# EAGLE board HFT-ArduinoShield-Module_1V0 (EAGLE 7.7.0)
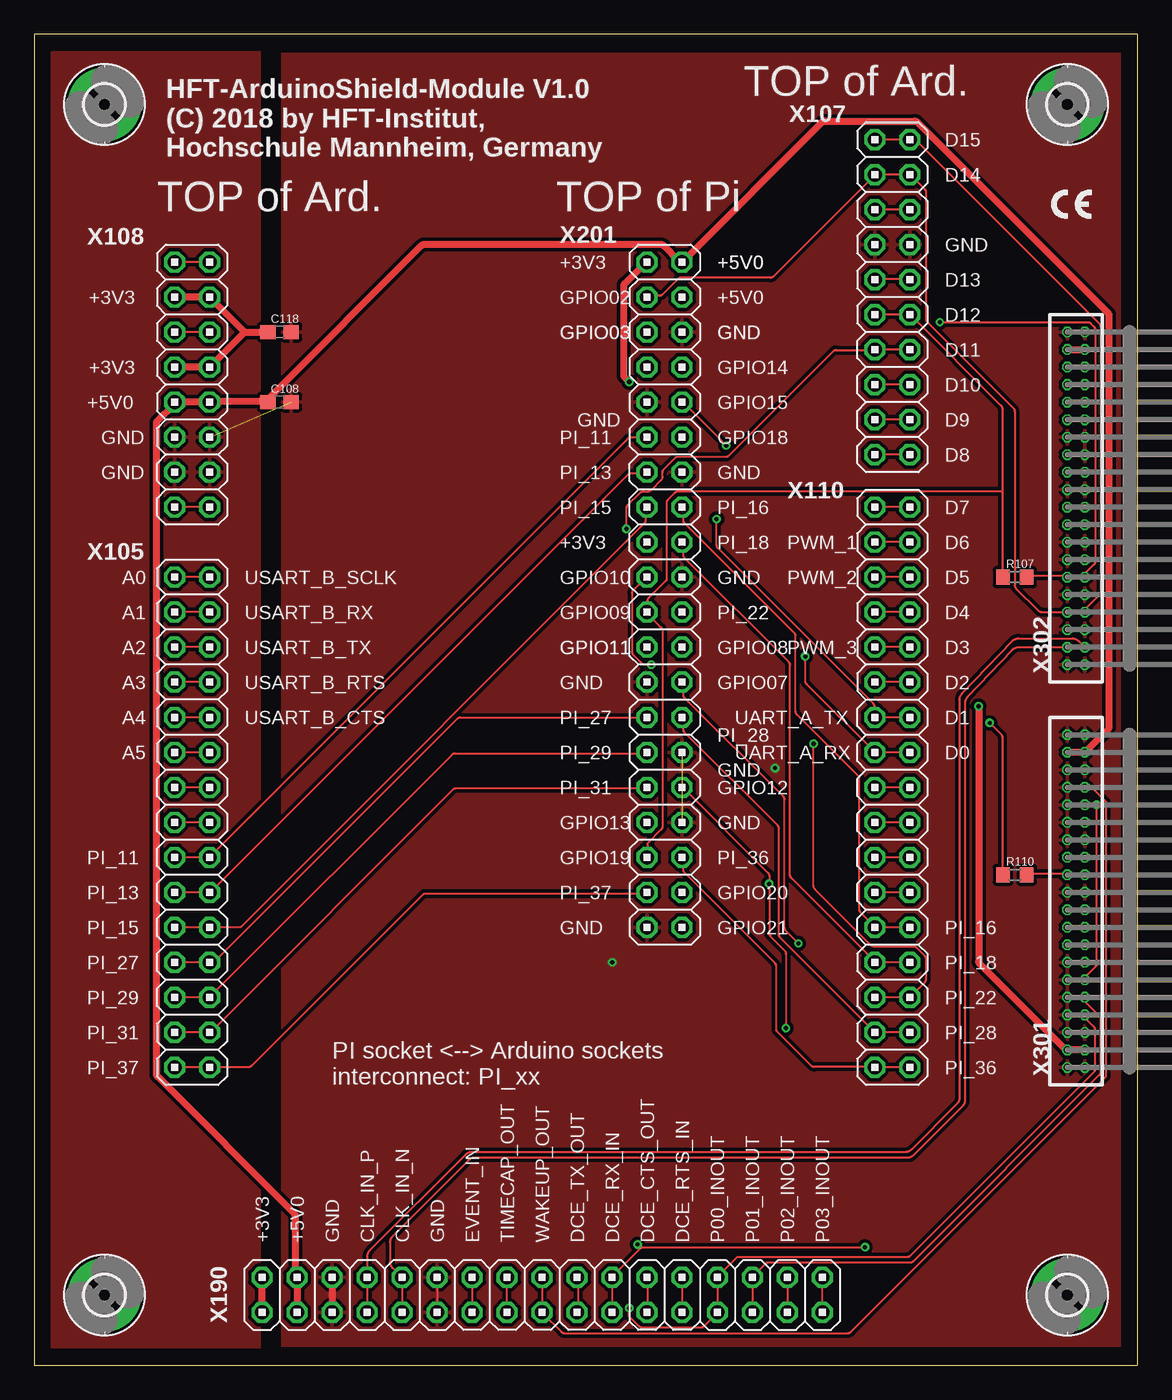
[diagram p0: board, top side]
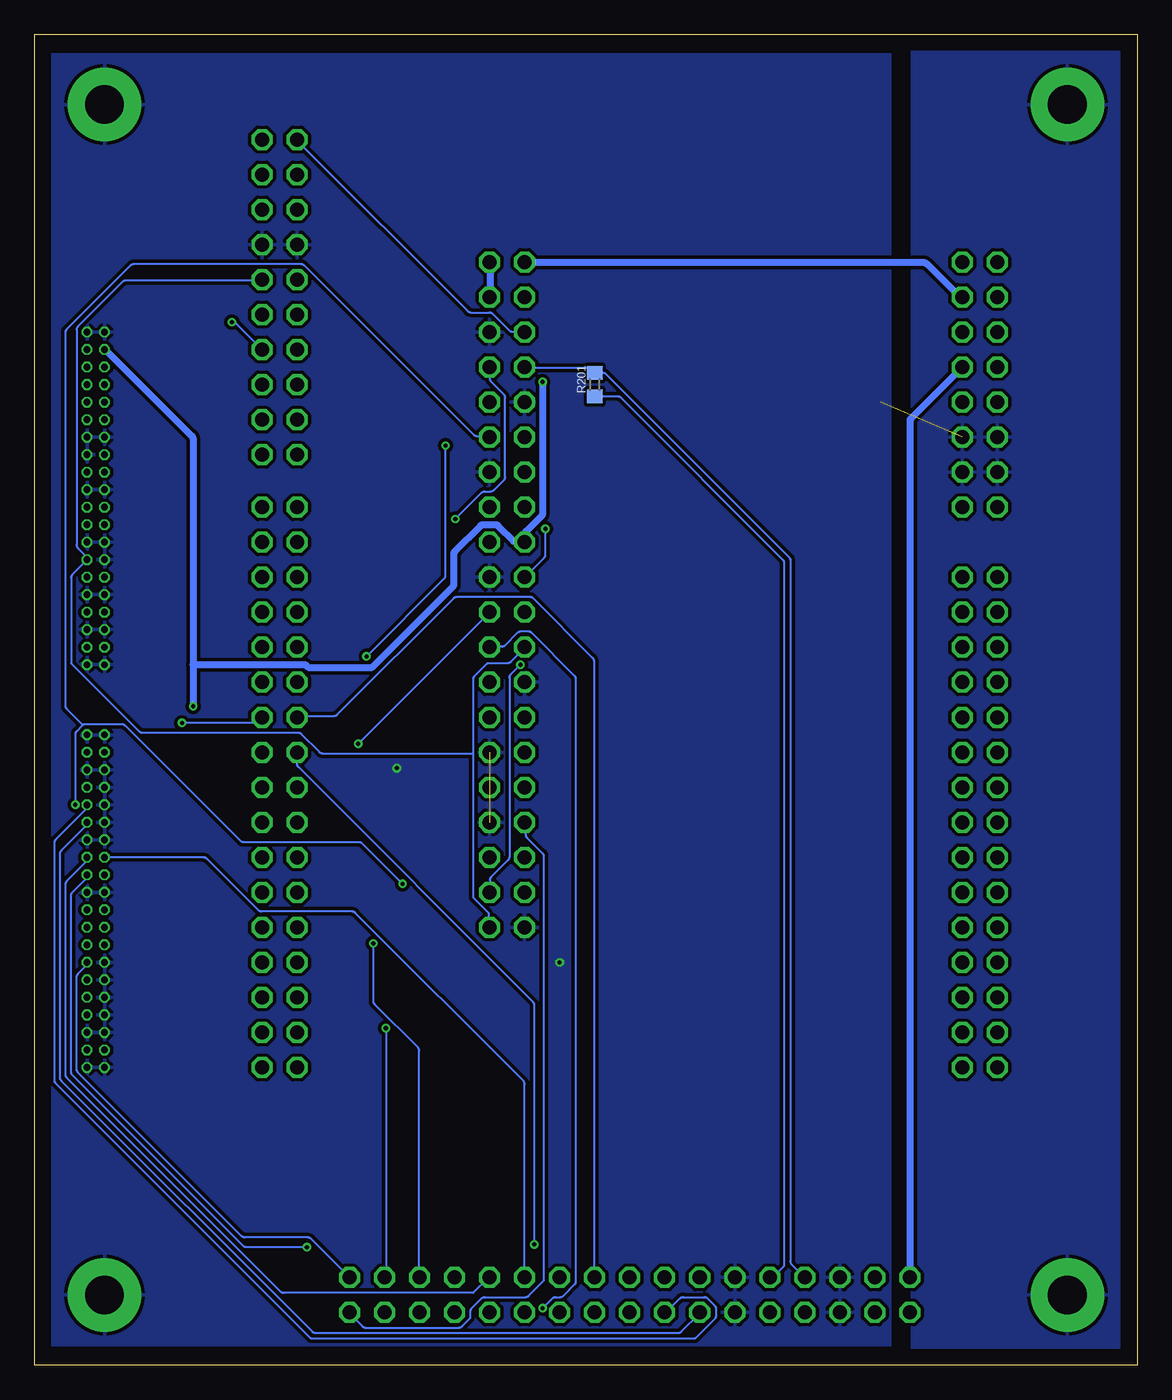
[diagram p1: board, bottom side, seen from below]

Size 80.01 x 96.52 mm. Coordinates in mm from the lower left corner, seen from the top.
Outline: 0,0 80.01,0 80.01,96.52 0,96.52 0,0
Copper layers ((1*2)+(15*16)): Top 0.035mm / dielectric 0.65mm / Route2 0.035mm / dielectric 0.65mm / Route15 0.035mm / dielectric 0.65mm / Bottom 0.035mm
Design rules "DirtyPCBs_4layers_6mil_20150401 *": minimum track width 6mil, minimum drill 12mil, track to track 0.25mm, track to pad 0.25mm, pad to pad 6mil, via to via 6mil, smd to smd 0mil, copper to edge 10mil, drill to drill 10mil, minimum pad ring 5mil, minimum via ring 6mil, stop-mask expansion 2mil, vias tented up to drill 25mil, thermal gap 10mil
Net classes: 1 power: width 0.5 mm; 2 bus: clearance 0.6 mm
tRestrict: area 95.2,0 to 96.5,96.5; area 16.5,0 to 96.5,1.3; area 16.5,0 to 17.8,96.5; area 16.5,95.2 to 96.5,96.5
bRestrict: area 16.5,95.2 to 96.5,96.5; area 95.2,0 to 96.5,96.5; area 16.5,0 to 96.5,1.3; area 16.5,0 to 17.8,96.5

## Footprints (pad centres in the part's own frame; a part is rotated, then mirrored left to right if it is on the bottom)
C0603 = smd 1.1 x 1: 1 -0.85,0; 2 0.85,0
2,8-PAD = drill 2.8 pad 5.334: B2,8 0,0
R0603 = smd 1 x 1.1: 1 -0.85,0; 2 0.85,0
2X15 = drill 1.016 octagon: 1 -19.05,-1.27; 2 -19.05,1.27; 3 -16.51,-1.27; 4 -16.51,1.27; 5 -13.97,-1.27; 6 -13.97,1.27; 7 -11.43,-1.27; 8 -11.43,1.27; 9 -8.89,-1.27; 10 -8.89,1.27; 11 -6.35,-1.27; 12 -6.35,1.27; 13 -3.81,-1.27; 14 -3.81,1.27; 15 -1.27,-1.27; 16 -1.27,1.27; 17 1.27,-1.27; 18 1.27,1.27; 19 3.81,-1.27; 20 3.81,1.27; 21 6.35,-1.27; 22 6.35,1.27; 23 8.89,-1.27; 24 8.89,1.27; 25 11.43,-1.27; 26 11.43,1.27; 27 13.97,-1.27; 28 13.97,1.27; 29 16.51,-1.27; 30 16.51,1.27
2X10 = drill 1.016 octagon: 1 -11.43,-1.27; 2 -11.43,1.27; 3 -8.89,-1.27; 4 -8.89,1.27; 5 -6.35,-1.27; 6 -6.35,1.27; 7 -3.81,-1.27; 8 -3.81,1.27; 9 -1.27,-1.27; 10 -1.27,1.27; 11 1.27,-1.27; 12 1.27,1.27; 13 3.81,-1.27; 14 3.81,1.27; 15 6.35,-1.27; 16 6.35,1.27; 17 8.89,-1.27; 18 8.89,1.27; 19 11.43,-1.27; 20 11.43,1.27
2X08 = drill 1.016 octagon: 1 -8.89,-1.27; 2 -8.89,1.27; 3 -6.35,-1.27; 4 -6.35,1.27; 5 -3.81,-1.27; 6 -3.81,1.27; 7 -1.27,-1.27; 8 -1.27,1.27; 9 1.27,-1.27; 10 1.27,1.27; 11 3.81,-1.27; 12 3.81,1.27; 13 6.35,-1.27; 14 6.35,1.27; 15 8.89,-1.27; 16 8.89,1.27
2X17 = drill 1.016 octagon: 1 -21.59,-1.27; 2 -21.59,1.27; 3 -19.05,-1.27; 4 -19.05,1.27; 5 -16.51,-1.27; 6 -16.51,1.27; 7 -13.97,-1.27; 8 -13.97,1.27; 9 -11.43,-1.27; 10 -11.43,1.27; 11 -8.89,-1.27; 12 -8.89,1.27; 13 -6.35,-1.27; 14 -6.35,1.27; 15 -3.81,-1.27; 16 -3.81,1.27; 17 -1.27,-1.27; 18 -1.27,1.27; 19 1.27,-1.27; 20 1.27,1.27; 21 3.81,-1.27; 22 3.81,1.27; 23 6.35,-1.27; 24 6.35,1.27; 25 8.89,-1.27; 26 8.89,1.27; 27 11.43,-1.27; 28 11.43,1.27; 29 13.97,-1.27; 30 13.97,1.27; 31 16.51,-1.27; 32 16.51,1.27; 33 19.05,-1.27; 34 19.05,1.27
2X20 = drill 1.016 octagon: 1 -22.86,-1.27; 2 -22.86,1.27; 3 -20.32,-1.27; 4 -20.32,1.27; 5 -17.78,-1.27; 6 -17.78,1.27; 7 -15.24,-1.27; 8 -15.24,1.27; 9 -12.7,-1.27; 10 -12.7,1.27; 11 -10.16,-1.27; 12 -10.16,1.27; 13 -7.62,-1.27; 14 -7.62,1.27; 15 -5.08,-1.27; 16 -5.08,1.27; 17 -2.54,-1.27; 18 -2.54,1.27; 19 0,-1.27; 20 0,1.27; 21 2.54,-1.27; 22 2.54,1.27; 23 5.08,-1.27; 24 5.08,1.27; 25 7.62,-1.27; 26 7.62,1.27; 27 10.16,-1.27; 28 10.16,1.27; 29 12.7,-1.27; 30 12.7,1.27; 31 15.24,-1.27; 32 15.24,1.27; 33 17.78,-1.27; 34 17.78,1.27; 35 20.32,-1.27; 36 20.32,1.27; 37 22.86,-1.27; 38 22.86,1.27; 39 25.4,-1.27; 40 25.4,1.27
2X20/90_1MM27_HARWIN_M50-3902042_HEADER = drill 0.5 pad 0.762 octagon: 1 -11.43,0; 2 -11.43,1.27; 3 -10.16,0; 4 -10.16,1.27; 5 -8.89,0; 6 -8.89,1.27; 7 -7.62,0; 8 -7.62,1.27; 9 -6.35,0; 10 -6.35,1.27; 11 -5.08,0; 12 -5.08,1.27; 13 -3.81,0; 14 -3.81,1.27; 15 -2.54,0; 16 -2.54,1.27; 17 -1.27,0; 18 -1.27,1.27; 19 0,0; 20 0,1.27; 21 1.27,0; 22 1.27,1.27; 23 2.54,0; 24 2.54,1.27; 25 3.81,0; 26 3.81,1.27; 27 5.08,0; 28 5.08,1.27; 29 6.35,0; 30 6.35,1.27; 31 7.62,0; 32 7.62,1.27; 33 8.89,0; 34 8.89,1.27; 35 10.16,0; 36 10.16,1.27; 37 11.43,0; 38 11.43,1.27; 39 12.7,0; 40 12.7,1.27

## Placement (x,y rotation side)
C108  100nF  [C0603]  17.78,69.85 0 top
C118  100nF  [C0603]  17.78,74.93 0 top
H401  MOUNT-PAD-ROUND2.8  [2,8-PAD]  74.93,91.44 0 top
H402  MOUNT-PAD-ROUND2.8  [2,8-PAD]  5.08,91.44 0 top
H403  MOUNT-PAD-ROUND2.8  [2,8-PAD]  5.08,5.08 0 top
H404  MOUNT-PAD-ROUND2.8  [2,8-PAD]  74.93,5.08 0 top
R107  47R  [R0603]  71.12,57.15 0 top
R110  47R  [R0603]  71.12,35.56 0 top
R201  120R  [R0603]  39.37,71.12 90 bottom
X105  [2X15]  11.43,38.1 270 top
X107  [2X10]  62.23,77.47 270 top
X108  [2X08]  11.43,71.12 270 top
X110  [2X17]  62.23,40.64 270 top
X190  [2X17]  38.1,5.08 0 top
X201  [2X20]  45.72,57.15 270 top
X301  2X20/90_1MM27_HARWIN_M50-3902042_HEADER  [2X20/90_1MM27_HARWIN_M50-3902042_HEADER]  76.2,33.02 90 top
X302  2X20/90_1MM27_HARWIN_M50-3902042_HEADER  [2X20/90_1MM27_HARWIN_M50-3902042_HEADER]  76.2,62.23 90 top

## Library data of the parts
C108 C118 R107 R110 R201 = df4iah_rcl
H401-H404 = holes
X105 X107 X108 X110 X190 X201 X301 X302 = df4iah_connector

## Nets
+3V3 [power]: C118.1 X108.3 X108.4 X108.7 X108.8 X190.1 X190.2 X201.1 X201.17 X301.3 X301.4 X302.37 X302.38
+5V0 [power]: C108.1 X108.9 X108.10 X190.3 X190.4 X201.2 X201.4 X301.37 X301.38
CLK_IN_N [bus]: R201.1 X190.9 X190.10 X302.4
CLK_IN_P [bus]: R201.2 X190.7 X190.8 X201.7 X302.3
DCE_CTS_OUT: X190.23 X190.24 X301.26
DCE_RTS_IN: X190.25 X190.26 X301.25
DCE_RX_IN: X110.15 X110.16 X190.21 X190.22 X201.10 X301.23
DCE_TX_OUT: R110.2 X301.24
DCE_TX_OUT_R: R110.1 X110.13 X110.14 X190.19 X190.20 X201.8
EVENT_IN: X190.13 X190.14 X301.29
GND: C108.2 C118.2 H401.B2,8 H402.B2,8 H403.B2,8 H404.B2,8 X107.7 X107.8 X108.11 X108.12 X108.13 X108.14 X190.5 X190.6 X190.11 X190.12 X201.6 X201.9 X201.14 X201.20 X201.25 X201.30 X201.34 X201.39 X301.1 X301.2 X301.5 X301.6 X301.8 X301.10 X301.12 X301.14 X301.21 X301.22 X301.27 X301.28 X301.30 X301.32 X301.34 X301.35 X301.36 X301.39 X301.40 X302.1 X302.2 X302.5 X302.6 X302.9 X302.10 X302.14 X302.15 X302.16 X302.21 X302.22 X302.25 X302.27 X302.28 X302.39 X302.40
I2C_SCL_IN: X107.1 X107.2 X201.5 X302.7
I2C_SDA_INOUT: X107.3 X107.4 X201.3 X302.8
I2S_A_FS_IN: X302.20
I2S_A_MCLK_IN: X302.19
I2S_A_SCK_IN: X302.17
I2S_A_SD_IN: X302.18
I2S_B_FS_OUT: X302.26
I2S_B_SCK_OUT: X302.23
I2S_B_SD_OUT: X302.24
N105_01: X105.1 X105.2
N105_03: X105.3 X105.4
N105_05: X105.5 X105.6
N105_07: X105.7 X105.8
N105_09: X105.9 X105.10
N105_11: X105.11 X105.12
N105_13: X105.13 X105.14
N105_15: X105.15 X105.16
N107_05: X107.5 X107.6
N107_15: X107.15 X107.16
N107_17: X107.17 X107.18
N107_19: X107.19 X107.20
N108_01: X108.1 X108.2
N108_05: X108.5 X108.6
N108_15: X108.15 X108.16
N110_01: X110.1 X110.2
N110_03: X110.3 X110.4
N110_05: X110.5 X110.6
N110_07: X110.7 X110.8
N110_09: X110.9 X110.10
N110_11: X110.11 X110.12
N110_17: X110.17 X110.18
N110_19: X110.19 X110.20
N110_21: X110.21 X110.22
N110_23: X110.23 X110.24
P00: X190.27 X190.28 X201.24 X301.7
P01: X190.29 X190.30 X201.26 X301.9
P02: X190.31 X190.32 X201.12 X201.32 X301.11
P03: X190.33 X190.34 X201.33 X301.13
PI_11: X105.17 X105.18 X201.11
PI_13: X105.19 X105.20 X201.13
PI_15: X105.21 X105.22 X201.15
PI_16: X110.25 X110.26 X201.16
PI_18: X110.27 X110.28 X201.18
PI_22: X110.29 X110.30 X201.22
PI_27: X105.23 X105.24 X201.27
PI_28: X110.31 X110.32 X201.28
PI_29: X105.25 X105.26 X201.29
PI_31: X105.27 X105.28 X201.31
PI_36: X110.33 X110.34 X201.36
PI_37: X105.29 X105.30 X201.37
SPI_MISO_OUT: R107.2 X302.12
SPI_MISO_OUT_R: R107.1 X107.11 X107.12 X201.21 X201.35
SPI_MOSI_IN: X107.13 X107.14 X201.19 X201.38 X302.11
SPI_SCK_IN: X107.9 X107.10 X201.23 X201.40 X302.13
TIMCAP_OUT: X190.15 X190.16 X301.31
WAKEUP_OUT: X190.17 X190.18 X301.33

## Tracks (layer width: path | path; a pad name or v marks a point on that pad's centre or on a via)
+3V3  (via drill 0.3)
  Top 0.5: X301.3 X301.4 74.73,22.94 68.59,29.08 arc-45 68.5,29.31 v68.5,47.78 | X108.7 X108.8 15.24,74.93 | 15.24,74.93 C118.1 | 15.24,74.93 X108.4 X108.3 | X302.38 74.94,73.64 76.14,73.64 X302.37 | X190.1 16.49,3.82 16.49,6.14 X190.2 | v43.15,71.33 42.84,71.64 arc-45 42.74,71.86 42.74,78.24 arc-45 42.84,78.46 44.35,79.98 X201.1
  Bottom 0.5: 12.77,77.46 X108.4 12.97,77.56 15.29,79.88 arc-45 15.51,79.98 44.35,79.98 X201.1 | 68.5,50.8 68.5,67.17 arc-45 68.59,67.39 74.83,73.64 X302.38 | 68.5,50.8 v68.5,47.78 | 68.5,50.8 60.35,50.8 60.15,50.6 55.52,50.6 49.68,56.44 arc-45 49.58,56.67 49.58,58.82 arc45 49.49,59.05 47.66,60.87 arc45 47.44,60.96 46.6,60.96 arc45 46.37,60.87 45.26,59.76 44.45,59.76 X201.17 44.35,59.96 44.35,60.46 43.24,61.58 arc-45 43.15,61.8 v43.15,71.33 | X190.2 16.49,6.44 16.49,68.48 arc45 16.39,68.7 12.77,72.33 X108.8
+5V0
  Top 0.5: X301.38 X301.37 76.34,44.57 77.86,46.08 arc45 77.95,46.31 77.95,76.12 arc45 77.86,76.35 64.06,90.14 arc45 63.84,90.24 57.36,90.24 arc45 57.14,90.14 47.07,80.08 X201.2 46.77,80.08 45.65,81.19 arc45 45.43,81.28 28.29,81.28 arc45 28.06,81.19 16.99,70.12 C108.1 16.89,69.92 12.87,69.92 X108.10 X108.9 10.05,69.61 8.93,68.5 arc45 8.84,68.28 8.84,21.16 arc45 8.93,20.93 18.81,11.06 arc-45 18.9,10.83 18.9,6.54 X190.4 X190.3
  Bottom 0.5: X201.4 46.97,77.56 46.97,79.98 X201.2
CLK_IN_N
  Top 0.152: X302.4 71.39,52.07 arc47 70.93,51.87 67.69,48.44 arc43 67.51,48.01 67.51,19.23 arc-45 67.33,18.78 63.77,15.22 arc-45 63.32,15.04 31.94,15.04 arc45 31.49,14.85 25.97,9.33 arc45 25.78,8.88 25.78,7.5 arc45 25.97,7.05 X190.10 X190.9
  Bottom 0.152: R201.1 37.67,70.27 arc45 37.5,70.2 25.7,58.4 arc45 25.63,58.22 25.63,7.3 arc45 25.72,7.08 26.4,6.39 | 26.4,6.39 26.44,6.35 | 26.4,6.39 26.45,6.44 26.65,6.44 X190.10
CLK_IN_P
  Top 0.152: X302.3 75.75,52.52 arc45 75.3,52.7 71.39,52.7 arc46 70.93,52.51 67.28,48.7 arc44 67.11,48.26 67.11,19.4 arc-45 66.92,18.95 63.6,15.63 arc-45 63.15,15.44 31.71,15.44 arc45 31.26,15.26 24.32,8.31 arc45 24.13,7.87 X190.8 24.13,6.34 24.13,3.82 X190.7
  Bottom 0.152: X190.8 25.08,7.3 arc45 25.17,7.53 25.17,58.41 arc-45 25.25,58.59 38.54,71.88 arc-45 38.76,71.97 R201.2 39.42,72.03 39.73,72.33 44.35,72.33 X201.7
DCE_CTS_OUT
  Top 0.152: X190.23 44.45,3.82 44.45,6.34 X190.24
  Bottom 0.152: X301.26 74.83,36.82 67.72,36.82 arc45 67.5,36.73 63.76,32.99 arc-45 63.54,32.9 56.96,32.9 arc45 56.73,32.8 44.55,20.61 arc45 44.45,20.39 44.45,6.44 X190.24
DCE_RTS_IN
  Top 0.152: X190.26 X190.25
  Bottom 0.152: X301.25 76.24,36.82 76.24,36.52 77.66,35.1 arc-45 77.75,34.88 77.75,21.06 arc-45 77.66,20.83 62.15,5.32 arc-45 61.93,5.23 48.18,5.23 47.07,6.34 X190.26
DCE_RX_IN  (via drill 0.3)
  Top 0.152: X190.21 X190.22 41.94,6.44 44,8.5 | X110.16 X110.15 60.95,44.47 56.02,49.4 arc-45 55.92,49.63 v55.92,51.41 | v50.19,66.7 47.07,69.82 X201.10 | v60.25,8.55 44.05,8.55 44,8.5 | 44,8.5 v43.75,8.75
  Bottom 0.152: v55.92,51.41 50.28,57.05 arc-45 50.19,57.27 v50.19,66.7 | v60.25,8.55 64.64,8.55 arc45 64.87,8.64 77.26,21.03 arc45 77.35,21.26 77.35,34.07 arc45 77.26,34.3 76.24,35.31 76.24,35.51 X301.23 | v43.75,8.75 43.75,26.12 arc-45 43.84,26.35 60.86,43.37 arc45 60.95,43.59 60.95,44.37 X110.15
DCE_TX_OUT
  Top 0.152: R110.2 72.02,35.61 74.83,35.61 X301.24
DCE_TX_OUT_R  (via drill 0.3)
  Top 0.152: X110.14 X110.13 60.95,47.08 60.95,47.75 arc45 60.86,47.98 49.58,59.26 arc-45 49.48,59.49 v49.48,61.37 | X190.19 39.42,3.82 39.42,6.34 X190.20 | v69.3,46.58 70.11,45.77 arc-45 70.21,45.54 70.21,35.61 R110.1
  Bottom 0.152: v69.3,46.58 63.97,46.58 63.57,46.98 X110.14 | v49.48,61.37 47.56,63.28 arc45 47.34,63.38 46.9,63.38 arc-45 46.67,63.47 45.95,64.19 arc-45 45.86,64.42 45.86,70.19 arc-45 45.95,70.41 46.88,71.33 arc45 46.97,71.56 46.97,72.33 X201.8 | X190.20 39.42,6.44 39.42,51.07 arc-45 39.52,51.3 43.86,55.64 arc-45 44.08,55.73 49.35,55.73 arc-45 49.58,55.64 58.04,47.17 arc45 58.27,47.08 60.95,47.08 X110.13
EVENT_IN
  Top 0.152: X190.14 31.78,6.34 31.78,3.82 X190.13
  Bottom 0.152: X301.29 76.24,39.34 76.24,39.13 78.06,37.31 arc-45 78.16,37.09 78.16,20.86 arc-45 78.06,20.63 59.84,2.41 arc-45 59.61,2.31 33.32,2.31 arc-45 33.09,2.41 31.78,3.72 X190.13
GND  (via drill 0.3)  (2 unrouted)
  Top 0.152: X190.12 X190.11
  Top 0.5: X190.6 X190.5
  other vias: 53.72,43.31 41.91,29.21
  pour Bottom: 1.27,95.25 78.74,95.25 78.74,1.27 1.27,1.27
  pour Top: 1.27,95.25 78.74,95.25 78.74,1.27 1.27,1.27
I2C_SCL_IN
  Top 0.152: X107.1 X107.2 63.57,88.83 63.97,88.83 77.26,75.54 arc-45 77.35,75.32 77.35,56.06 arc-45 77.26,55.84 76.24,54.83 76.24,54.63 X302.7
  Bottom 0.152: X201.5 44.45,74.95 45.33,74.95 arc45 45.55,75.04 46.77,76.26 arc-45 47,76.36 48.35,76.36 arc45 48.57,76.45 60.95,88.83 X107.1
I2C_SDA_INOUT
  Top 0.152: X302.8 74.83,54.63 73.06,54.63 arc-45 72.83,54.72 71.21,56.34 arc-45 71.11,56.57 71.11,69.18 arc45 71.02,69.41 64.67,75.75 64.67,85.08 arc45 64.58,85.3 63.57,86.31 X107.4 X107.3 60.95,86.31 53.6,78.96 arc-45 53.38,78.87 46.9,78.87 arc45 46.67,78.78 45.55,77.66 arc-45 45.33,77.56 44.45,77.56 X201.3
N105_01
  Top 0.152: X105.2 X105.1
N105_03
  Top 0.152: X105.4 X105.3
N105_05
  Top 0.152: X105.6 X105.5
N105_07
  Top 0.152: X105.8 X105.7
N105_09
  Top 0.152: X105.10 X105.9
N105_11
  Top 0.152: X105.12 X105.11
N105_13
  Top 0.152: X105.14 X105.13
N105_15
  Top 0.152: X105.16 X105.15
N107_05
  Top 0.152: X107.6 X107.5
N107_15
  Top 0.152: X107.16 X107.15
N107_17
  Top 0.152: X107.18 X107.17
N107_19
  Top 0.152: X107.20 X107.19
N108_01
  Top 0.152: X108.2 X108.1
N108_05
  Top 0.152: X108.6 X108.5
N108_15
  Top 0.152: X108.16 X108.15
N110_01
  Top 0.152: X110.2 X110.1
N110_03
  Top 0.152: X110.4 X110.3
N110_05
  Top 0.152: X110.6 X110.5
N110_07
  Top 0.152: X110.8 X110.7
N110_09
  Top 0.152: X110.10 X110.9
N110_11
  Top 0.152: X110.12 X110.11
N110_17
  Top 0.152: X110.18 X110.17
N110_19
  Top 0.152: X110.20 X110.19
N110_21
  Top 0.152: X110.22 X110.21
N110_23
  Top 0.152: X110.24 X110.23
P00  (via drill 0.3)
  Top 0.152: X301.7 76.24,25.35 76.24,25.15 76.85,24.54 arc-45 76.95,24.31 76.95,21.46 arc-45 76.85,21.23 63.56,7.94 arc-45 63.34,7.85 50.99,7.85 49.58,6.44 X190.28 X190.27 49.48,3.72 48.57,2.81 arc-45 48.35,2.72 44.08,2.72 arc-45 43.86,2.81 43.15,3.52 v43.15,4.12
  Bottom 0.152: v43.15,4.12 42.43,4.84 arc45 42.21,4.93 41.87,4.93 arc-45 41.64,5.02 40.82,5.84 arc-45 40.73,6.07 40.73,49.77 arc-45 40.82,49.99 43.96,53.12 arc-45 44.18,53.22 44.72,53.22 arc-45 44.95,53.12 45.87,52.2 arc45 46.09,52.11 46.97,52.11 X201.24
P01  (via drill 0.3)
  Top 0.152: X190.29 X190.30 52.1,6.44 53.01,7.35 arc-45 53.24,7.44 63.54,7.44 arc45 63.76,7.54 77.26,21.03 arc45 77.35,21.26 77.35,25.12 arc45 77.26,25.34 76.24,26.36 76.24,26.66 X301.9 | v55.42,30.58 54.51,31.5 arc-45 54.41,31.72 54.41,41.01 arc45 54.32,41.24 47.16,48.4 arc-45 47.07,48.62 47.07,49.49 X201.26
  Bottom 0.152: v55.42,30.58 55.42,26.39 arc-45 55.33,26.16 52.19,23.03 arc45 52.1,22.8 52.1,6.44 X190.30
P02  (via drill 0.3)
  Top 0.152: X190.32 X190.31 | v77.05,40.64 77.05,29.1 arc-45 76.95,28.88 76.24,28.17 76.24,27.97 X301.11 | X201.32 47.07,41.85 53.21,35.7 arc-45 53.31,35.48 v53.31,34.91 53.31,31.32 arc45 53.4,31.09 54.42,30.07 arc-45 54.51,29.85 v54.51,24.45
  Bottom 0.152: 76.5,46.43 76.95,45.97 arc-45 77.05,45.74 v77.05,40.64 | 76.5,46.43 76.44,46.48 73.66,46.48 arc45 73.43,46.38 65.07,38.02 arc-45 64.84,37.93 56.46,37.93 arc45 56.23,37.83 v53.31,34.91 | 76.5,46.43 77.66,47.59 arc45 77.75,47.82 77.75,74.92 arc45 77.66,75.14 73.02,79.78 arc45 72.79,79.88 60.68,79.88 arc45 60.46,79.78 48.17,67.5 arc-45 47.94,67.4 47.07,67.4 X201.12 | v54.51,24.45 54.51,6.44 X190.32
P03
  Top 0.152: X190.33 57.13,3.82 57.13,6.34 X190.34
  Bottom 0.152: X301.13 76.24,29.17 76.24,28.97 76.85,28.36 arc-45 76.95,28.14 76.95,21.46 arc-45 76.85,21.23 64.97,9.35 arc-45 64.74,9.26 60.18,9.26 arc45 59.95,9.16 57.23,6.44 X190.34 | X201.33 44.35,39.34 44.35,38.46 arc-45 44.26,38.24 43.14,37.11 arc45 43.05,36.89 43.05,6.14 44.16,5.02 arc45 44.38,4.93 47.34,4.93 arc-45 47.56,4.84 48.28,4.12 arc-45 48.38,3.89 48.38,3.55 arc45 48.47,3.33 48.99,2.81 arc45 49.21,2.72 55.99,2.72 arc45 56.22,2.81 57.13,3.72 X190.33
PI_11
  Top 0.152: X105.17 X105.18 12.77,36.92 43.05,67.21 arc-45 43.28,67.3 44.35,67.3 X201.11
PI_13
  Top 0.152: X105.19 X105.20 12.77,34.3 43.05,64.59 arc-45 43.28,64.69 44.35,64.69 X201.13
PI_15
  Top 0.152: X105.21 X105.22 12.77,31.79 14.98,31.79 44.26,61.07 arc45 44.35,61.3 44.35,62.17 X201.15
PI_16
  Top 0.152: X110.26 X110.25 60.95,31.79 59.94,32.8 arc-45 59.84,33.03 59.84,42.65 55.31,47.19 arc-45 55.22,47.41 55.22,52.88 arc45 55.12,53.11 47.16,61.07 arc-45 47.07,61.3 47.07,62.17 X201.16
PI_18
  Top 0.152: X110.28 X110.27 60.95,29.27 54.91,35.32 arc-45 54.81,35.54 54.81,50.77 arc45 54.72,51 47.16,58.56 arc-45 47.07,58.78 47.07,59.66 X201.18
PI_22  (via drill 0.3)
  Top 0.152: X110.29 X110.30 63.55,26.74 arc-8 63.58,26.77 64.58,27.77 arc45 64.67,28 64.67,29.45 arc45 64.58,29.67 63.96,30.29 arc45 63.74,30.38 60.88,30.38 arc-45 60.66,30.47 56.62,34.51 arc-45 56.53,34.74 v56.53,45.07
  Bottom 0.152: v56.53,45.07 47.07,54.52 X201.22
PI_27
  Top 0.152: X105.23 X105.24 12.77,29.27 13.07,29.27 30.68,46.89 arc-45 30.9,46.98 44.35,46.98 X201.27
PI_28
  Top 0.152: X110.32 X110.31 60.95,24.14 54.1,30.99 arc-45 54.01,31.22 54.01,38.9 arc45 53.92,39.13 47.16,45.88 arc-45 47.07,46.11 47.07,46.98 X201.28
PI_29
  Top 0.152: X105.25 X105.26 12.77,26.76 30.28,44.27 arc-45 30.5,44.37 44.35,44.37 X201.29
PI_31
  Top 0.152: X105.27 X105.28 12.77,24.14 30.38,41.76 arc-45 30.6,41.85 44.35,41.85 X201.31
PI_36
  Top 0.152: X110.34 X110.33 60.95,21.63 56.56,21.63 arc-45 56.33,21.72 53.9,24.15 arc-45 53.81,24.38 53.81,28.94 arc45 53.72,29.17 47.16,35.72 arc-45 47.07,35.95 47.07,36.82 X201.36
PI_37
  Top 0.152: X105.29 X105.30 12.77,21.63 15.55,21.63 arc45 15.78,21.72 28.16,34.11 arc-45 28.39,34.2 44.35,34.2 X201.37
SPI_MISO_OUT
  Top 0.152: R107.2 72.02,57.24 74.83,57.24 X302.12
SPI_MISO_OUT_R
  Top 0.152: X107.11 X107.12 63.57,76.15 70.11,69.61 arc-45 70.21,69.38 70.21,63.38 | X201.35 44.45,36.92 44.45,37.83 45.47,38.84 arc45 45.56,39.06 45.56,53.29 arc45 45.47,53.51 44.51,54.47 arc-43 X201.21 44.45,54.63 44.45,55.4 arc-45 44.55,55.62 45.86,56.94 45.86,62.54 arc-45 45.95,62.77 46.47,63.28 arc-45 46.7,63.38 70.21,63.38 | 70.21,63.38 70.21,57.24 R107.1
SPI_MOSI_IN  (via drill 0.3)
  Top 0.152: X107.14 X107.13 60.95,73.64 58.17,73.64 arc45 57.94,73.55 50.38,65.99 arc-45 50.16,65.89 46.7,65.89 arc45 46.47,65.8 45.65,64.98 arc45 45.56,64.75 45.56,64.42 arc-45 45.47,64.19 44.75,63.47 arc-45 44.52,63.38 44.18,63.38 arc45 43.96,63.28 43.04,62.36 arc45 42.95,62.14 v42.95,60.66 | v65.68,75.65 76.41,75.65 arc-45 76.64,75.56 76.85,75.34 arc-45 76.95,75.12 76.95,58.28 arc-45 76.85,58.05 76.24,57.44 76.24,57.24 X302.11 | v44.76,50.8 44.28,50.8 arc-45 44.06,50.9 43.44,51.52 arc-45 43.35,51.74 43.35,56 arc-45 43.44,56.23 44.35,57.14 X201.19
  Bottom 0.152: v65.68,75.65 65.48,75.65 63.57,73.74 X107.14 | v44.76,50.8 45.47,50.09 arc-45 45.56,49.87 45.56,36.85 arc45 45.65,36.63 46.88,35.4 arc-45 46.97,35.18 46.97,34.3 X201.38 | v42.95,60.66 42.95,58.78 arc45 43.04,58.56 44.35,57.24 X201.19
SPI_SCK_IN
  Top 0.152: X107.9 61.05,78.77 63.47,78.77 X107.10
  Bottom 0.152: 48.18,44.37 48.18,49.77 arc45 48.08,49.99 47.26,50.81 arc45 47.04,50.9 45.69,50.9 arc-45 45.47,51 44.45,52.01 X201.23 | 48.18,44.37 48.18,33.9 47.07,32.8 47.07,31.79 X201.40 | X107.10 63.57,78.67 73.39,78.67 arc-45 73.62,78.58 76.85,75.34 arc-45 76.95,75.12 76.95,59.49 arc-45 76.85,59.26 76.24,58.65 76.24,58.45 X302.13 76.24,58.35 77.26,57.33 arc-45 77.35,57.11 77.35,50.9 72.41,45.97 arc-45 72.19,45.87 60.88,45.87 arc45 60.66,45.78 59.34,44.46 arc-45 59.11,44.37 48.18,44.37
TIMCAP_OUT
  Top 0.152: X190.15 X190.16
  Bottom 0.152: X301.31 76.24,40.54 76.24,40.34 78.46,38.12 arc-45 78.56,37.9 78.56,20.65 arc-45 78.46,20.43 60.04,2 arc-45 59.81,1.91 32.21,1.91 arc-45 31.99,2 30.66,3.33 arc-45 30.57,3.55 30.57,4.09 arc-45 30.66,4.32 31.18,4.84 arc-45 31.41,4.93 32.95,4.93 arc-45 33.18,4.84 34.19,3.82 X190.15
WAKEUP_OUT
  Top 0.152: X190.18 X190.17 36.91,3.72 38.22,2.41 arc45 38.45,2.31 59.01,2.31 arc45 59.23,2.41 77.66,20.83 arc45 77.75,21.06 77.75,40.71 arc45 77.66,40.94 76.84,41.76 arc45 76.61,41.85 76.24,41.85 X301.33

## Text on the board
tPlace: TOP of Ard. | HFT-ArduinoShield-Module V1.0 / (C) 2018 by HFT-Institut, / Hochschule Mannheim, Germany | D15 | D14 | TOP of Ard. | TOP of Pi | GND | +3V3 | +5V0 | +5V0 | D13 | +3V3 | GPIO02 | +5V0 | D12 | GPIO03 | GPIO03 | GND | GND | D11 | +3V3 | GPIO14 | D10 | +5V0 | GPIO15 | GND | D9 | GND | PI_11 | GPIO18 | D8 | GND | PI_13 | GND | PI_15 | PI_16 | D7 | +3V3 | PI_18 | PWM_1 | D6 | A0 | USART_B_SCLK | GPIO10 | GND | PWM_2 | D5 | A1 | USART_B_RX | GPIO09 | PI_22 | D4 | A2 | USART_B_TX | GPIO11 | GPIO11 | GPIO08 | PWM_3 | D3 | A3 | USART_B_RTS | GND | GPIO07 | D2 | A4 | USART_B_CTS | PI_27 | UART_A_TX | D1 | PI_28 | A5 | PI_29 | UART_A_RX | D0 | GND | PI_31 | GPIO12 | GPIO13 | GND | PI_11 | GPIO19 | PI_36 | PI_13 | PI_37 | GPIO20 | PI_15 | GND | GPIO21 | PI_16 | PI_27 | PI_18 | PI_29 | PI_22 | PI_31 | PI_28 | PI_37 | PI_36 | PI socket <--> Arduino sockets / interconnect: PI_xx | +3V3 | +5V0 | GND | CLK_IN_P | CLK_IN_N | GND | EVENT_IN | TIMECAP_OUT | WAKEUP_OUT | DCE_TX_OUT | DCE_RX_IN | DCE_CTS_OUT | DCE_RTS_IN | P00_INOUT | P01_INOUT | P02_INOUT | P03_INOUT
tDocu: 3.5 mm / 2 for each board | 4x 2.8 mm